# Altium PCB ioT.PcbDoc (part 3 of 3)
Units mm, origin at the board's own origin, x right, y up, seen from the top; angles counter-clockwise.
Board outline 92 x 94 mm, 4 copper layers (Top Layer, GROUND, POWER, Bottom Layer), stack 1.369 mm thick; 127 components, 88 nets, 449 pads, 105 vias.
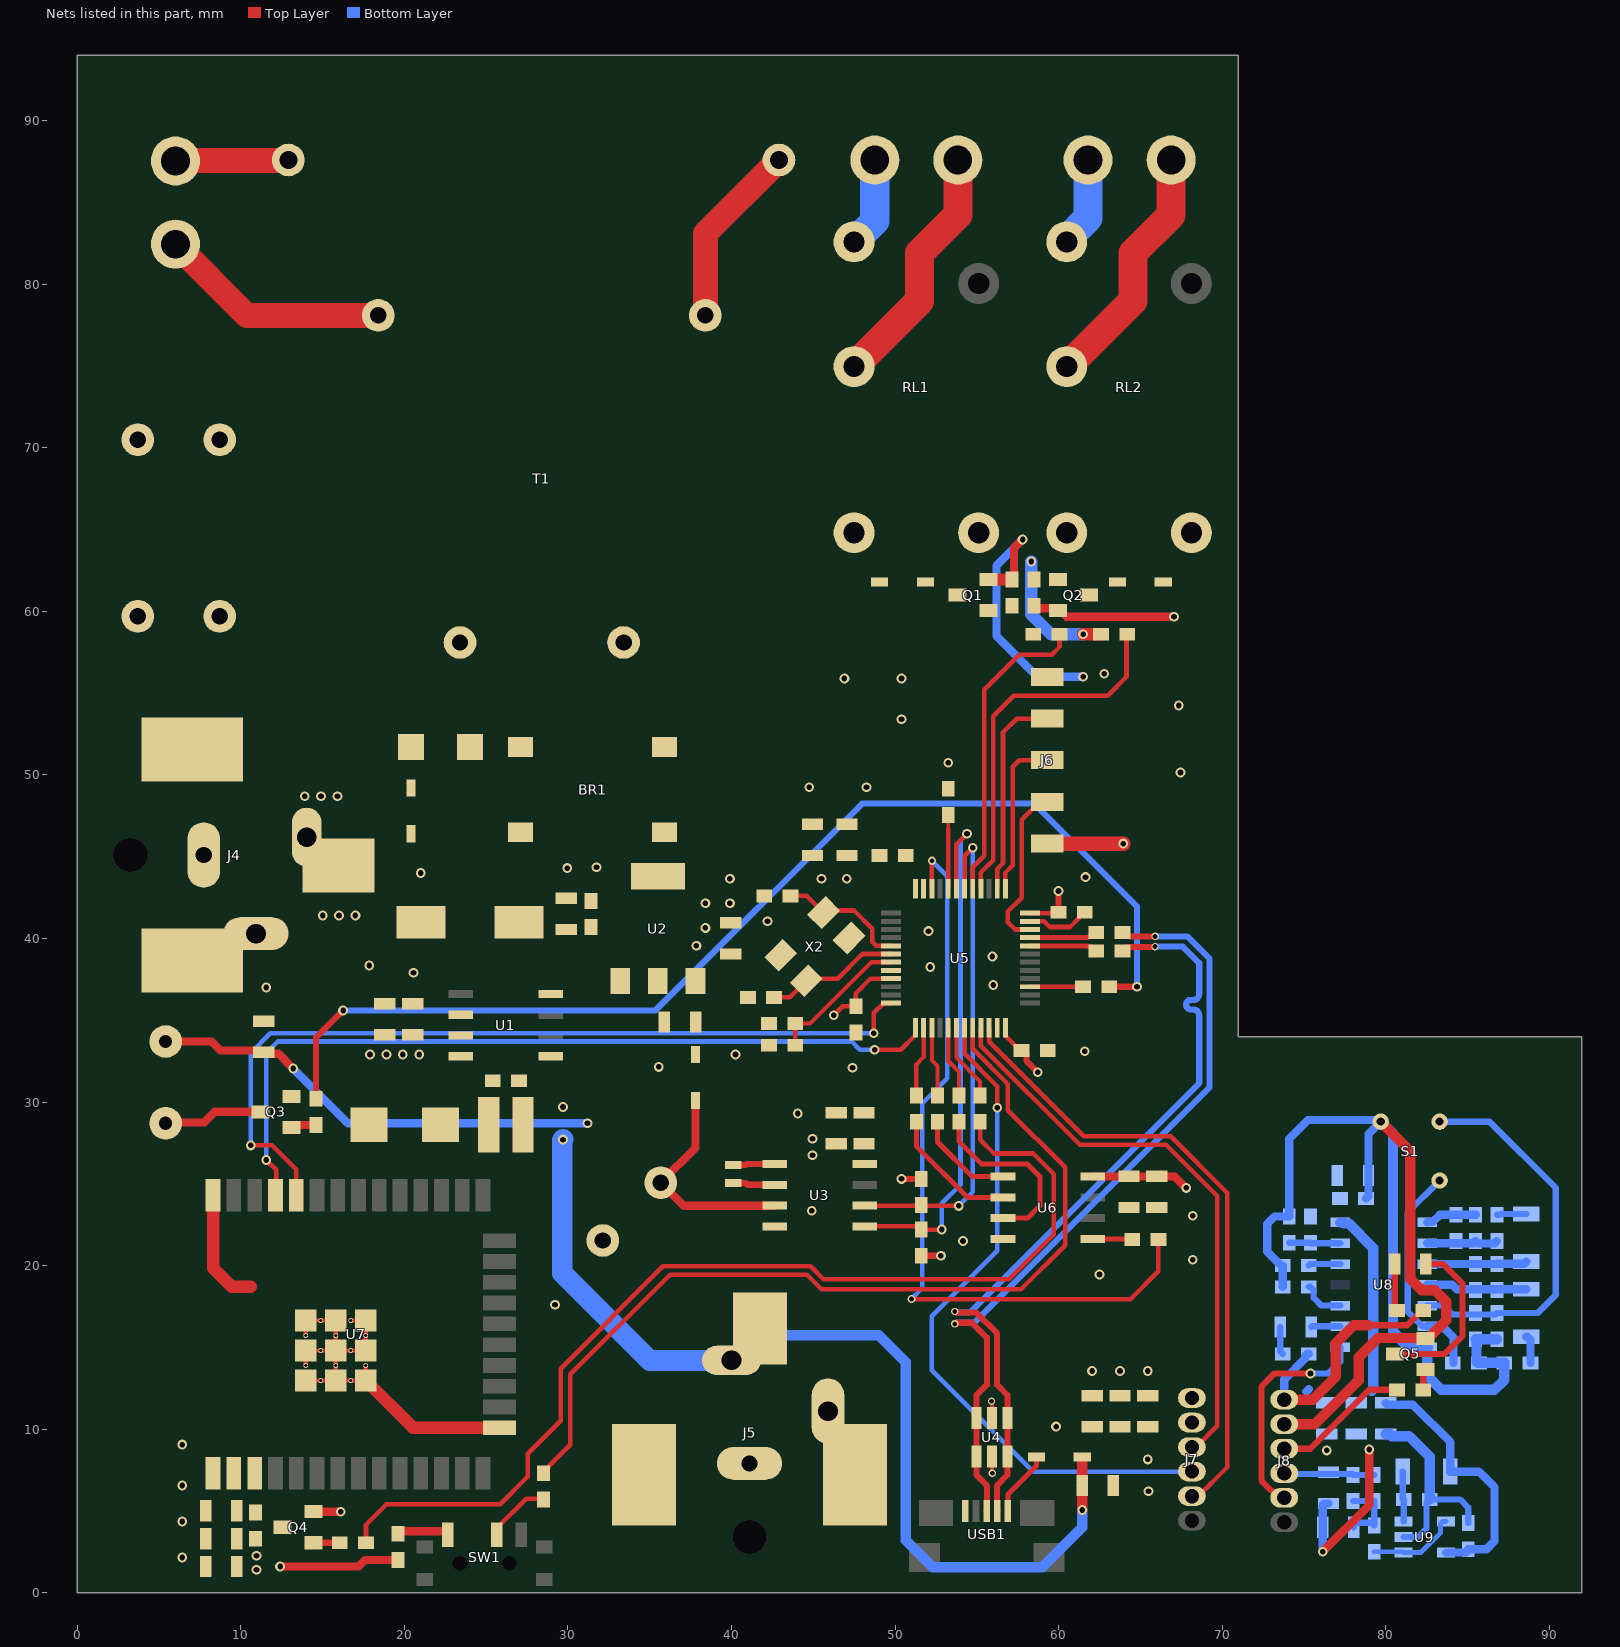
[diagram p4: the nets of this part, all layers, seen from the top]

## Part data (continued)
X2: library part "CRYSTAL 16MHz", "CRYSTAL 16.0000MHZ 20PF SMD", Case/Package=SMD/SMT, ESR (Equivalent Series Resistance)=50R, Frequency=16MHz, Frequency Stability=50ppm, Frequency Tolerance=30ppm, Load Capacitance=20pF, Manufacturer="ECS International", Max Operating Temperature=70°C, Min Operating Temperature=-20°C, Package Quantity=1, Supplier Part Number 1=XC1120CT-ND, Category=Crystals, ComponentLink1Description=https://datasheet.ciiva.com/853/ecx-53b-853408.pdf?src-supplier=Digi-Key, ComponentLink1URL=https://datasheet.ciiva.com/853/ecx-53b-853408.pdf?src-supplier=Digi-Key, ComponentLink2Description=https://datasheet.ciiva.com/853/ecx-53b-853406.pdf?src-supplier=Digi-Key, ComponentLink2URL=https://datasheet.ciiva.com/853/ecx-53b-853406.pdf?src-supplier=Digi-Key, ComponentLink3Description=https://datasheet.ciiva.com/853/ecx-53b-853407.pdf?src-supplier=Digi-Key, ComponentLink3URL=https://datasheet.ciiva.com/853/ecx-53b-853407.pdf?src-supplier=Digi-Key, Designed by=BERK, Height=0.033inch, Lead Free="Lead Free", Length=0.197inch, Manufacturer Part Number=ECS-160-20-30B-TR, Mount="Surface Mount", Packaging="Tape and Reel", Pricing 1="1=1,33000, 10=1,26800, 50=1,23900, 100=1,06200, 500=1,03250 (USD)", RoHS=Yes, RoHS Compliant=Yes, series=ECX-53B, Stock 1=15303, Supplier 1=Digi-Key, Termination=SMD/SMT, Tolerance=50ppm, Width=0.126inch

## Via types
v1: diameter 0.6, hole 0.35, Top Layer to Bottom Layer, tented both sides, 97 vias
v2: diameter 0.45, hole 0.3, Top Layer to Bottom Layer, 4 vias
v3: diameter 0.45, hole 0.3, Top Layer to Bottom Layer, tented both sides, 2 vias
v4: diameter 0.5, hole 0.3, Top Layer to Bottom Layer, tented both sides, 1 vias
v5: diameter 0.5, hole 0.3, Top Layer to Bottom Layer, 1 vias

## Nets (pads, with @x,y where several pads share a name; then routed paths per layer and width w, separated by ;. In a path a pad name is that pad's centre, name@x,y a point inside that pad or via, vN(x,y) a via of type N, cw(c..) or ccw(c..) an arc to the next point about the centre after c; other vN are vias at no path point)
3V3DC: C8.2 C9.2 C10.2 C13.2 C14.2 C17.2 C18.2 C21.2 C22.2 C23.2 C24.2 C25.2 C26.2 C27.2 C28.2 C29.2 C30.2 C31.2 D5.2 J6.1 J7.1 R17.2 R18.2 R19.2 R21.2 U2.3 U3.8 U4.5 U5.9 U5.24 U5.36 U5.48 U6.8 U7.2 | length 33.1
  Top Layer w0.254: U4.5@55.925,8.325 55.925,7.325 v2(55.95,7.3)
  Top Layer w0.279: v1(46.25,35.3) 46.8,35.85 C28.2@47.6,35.85 47.608,35.858 47.608,36.658 48.5,37.55 U5.9@49.75,37.55 ; U5.24@56.75,34.55 56.76,34.54 56.76,34.033 57.544,33.25 57.632,33.151 C27.2@57.738,33.151 ; U5.36@58.25,41.55 59.95,41.55 C26.2@60,41.6
  Top Layer w0.381: v1(50.4,25.3) R17.2@51.6,25.3 ; R18.2@51.6,20.6 v1(52.8,20.6) ; C27.2@57.738,33.151 57.827,33.151 58.03,32.948 58.03,32.519 v1(58.728,31.821) ; C26.2@60,41.6 v1(60,42.9)
  Top Layer w0.508: v1(12.4,1.6) 17.2,1.6 17.6,2 R21.2@19.6,2 ; U6.8@62.1,25.44 65.086,25.44 65.096,25.45 C21.2@66,25.45 67.1,25.45 v1(67.8,24.75)
  Top Layer w0.889: J6.1@59.3,45.82 59.357,45.763 59.395,45.8 v1(63.95,45.8)
  other v1: 10.95,1.4 10.95,2.25 62.05,13.55 63.75,13.55 65.45,13.55 44.95,26.75 44.95,27.75 37.85,39.55 38.4,40.65 38.4,42.15 39.9,42.15 39.9,43.65
3V3DC_S: C34.2 C35.2 C40.2 C41.2 C42.2 C45.2 J8.1 R24.2 R26.2 R32.2 RT1.2 U8.14 U9.5 | length 42.8
  Top Layer w0.381: 78.95,16.35 81.311,16.35 82.211,17.25 R32.2@82.3,17.25
  Top Layer w0.635: J8.1@73.8,11.8 75.536,11.8 76.95,13.214 76.95,15.25 78.05,16.35 78.95,16.35
  Bottom Layer w0.508: 73.8,12.5 73.8,13.039 75.072,14.31 75.072,14.46 75.211,14.6 R26.2@75.3,14.6 ; 75.15,12.3 75.3,12.45 ; C42.2@80,11.6 80.096,11.504 80.677,11.504 80.694,11.487 81.663,11.487 83.95,9.2 RT1.2@83.95,7.4 85.7,7.4 86.65,6.45 86.65,3.15 86.15,2.65 C45.2@85.05,2.65 85.05,2.59 84.91,2.45 U9.5@83.7,2.45
  Bottom Layer w0.635: U8.14@77.221,22.634 77.401,22.634 77.428,22.607 77.428,22.572 77.735,22.572 79.25,21.057 79.25,12.45 79.15,12.35
5VDC: BZ1.2 C3.2 C6.1 C11.2 C12.2 C32.2 D3.1 J5.1 L1.2 U1.4 U2.1 | length 88.1
  Top Layer w0.508: BZ1.2@5.4,33.7 8.2,33.7 8.754,33.146 11.304,33.146 11.496,32.954 12.296,32.954 v1(13.2,32.05)
  Top Layer w0.635: v1(61.45,5.05) 61.45,6.5 61.425,6.525 C3.2@61.45,6.55 D3.1@61.45,8.05
  Bottom Layer w0.508: v1(13.2,32.05) 16.55,28.7 v1(31.2,28.7)
  Bottom Layer w0.635: J5.1@40,14.2 40.9,14.2 42.45,15.75 49,15.75 50.65,14.1 50.65,3.2 52.3,1.55 59,1.55 61.45,4 v1(61.45,5.05)
  Bottom Layer w1.27: v1(29.7,27.7) 29.65,27.65 29.65,19.55 35,14.2 J5.1@40,14.2
  other v1: 29.7,29.7
12VDC: C4.2 C5.2 D1.1 D2.1 D8.1 J4.1 RL1.5 RL2.4 U1.7
  other v1: 17.9,32.9 18.9,32.9 19.9,32.9 20.9,32.9 15,41.4 16,41.4 17,41.4 13.9,48.7 14.9,48.7 15.9,48.7
AC_LINE_1: J1.1 R1.1 | length 6.9
  Top Layer w1.524: J1.1@6,87.54 6.03,87.57 12.87,87.57 R1.1@12.9,87.6
AC_LINE_2: J1.2 T1.5 | length 14.2
  Top Layer w1.524: J1.2@6,82.46 10.36,78.1 T1.5@18.4,78.1
BUZZER: R11.2 R16.1 | length 69.1
  Top Layer w0.381: R16.1@14.6,30.2 14.6,33.95 v1(16.25,35.6) ; R11.2@63.1,37.05 v1(64.8,37.05)
  Bottom Layer w0.381: v1(16.25,35.6) 35.35,35.6 48,48.25 58.5,48.25 64.8,41.95 v1(64.8,37.05)
GND: BR1.4 C1.2 C2.2 C3.1 C4.1 C5.1 C6.2 C8.1 C9.1 C10.1 C11.1 C12.1 C13.1 C14.1 C15.2 C16.2 C17.1 C18.1 C19.2 C20.2 C21.1 C22.1 C23.1 C24.1 C25.1 C26.1 C27.1 C28.1 C29.1 C30.1 C31.1 C32.1 D4.A J4.2 J4.3 J5.2 J5.3 J6.5 J7.2 Q1.2 Q2.2 Q3.2 Q4.2 R4.1 R5.1 R9.1 R10.1 U1.6 U2.2 U3.4 U4.2 U5.8 U5.23 U5.35 U5.47 U6.4 U7.1 U7.15 U7.38 U7.39 USB1.5 X2.2 X2.4 | length 67.3
  Top Layer w0.254: U7.39@13.965,12.965 U7.39@14.883,12.965 U7.39@15.8,12.965 ; U7.39@13.965,13.882 U7.39@13.965,14.8 U7.39@14.883,14.8 U7.39@15.8,14.8 ; U7.39@13.965,15.717 U7.39@13.965,16.635 U7.39@14.883,16.635 U7.39@15.8,16.635 U7.39@15.8,15.717 U7.39@15.8,14.8 ; U7.39@16.718,16.635 U7.39@17.635,16.635 U7.39@17.635,15.717 U7.39@17.635,14.8 U7.39@16.718,14.8 U7.39@15.8,14.8 ; U7.39@17.635,13.882 U7.39@17.635,12.965 U7.39@16.718,12.965 U7.39@15.8,12.965 ; U4.2@55.925,10.675 v2@55.925,11.675 ; U7.39@15.8,12.965 U7.39@15.8,13.882 U7.39@15.8,14.8
  Top Layer w0.279: U5.35@58.25,41.05 59.104,41.05 59.454,40.7 60.7,40.7 61.257,41.257 61.257,41.346 61.511,41.6 C26.1@61.6,41.6
  Top Layer w0.508: Q4.2@14.445,4.95 v1(16.1,4.95) ; R4.1@57.155,61.95 57.27,62.065 57.27,63.87 v1(57.8,64.4) ; R5.1@58.5,60.35 58.5,60.336 58.64,60.196 59.809,60.196 Q2.2@59.955,60.05 ; Q2.2@60.105,60.05 60.48,59.675 v1(67.05,59.675)
  Top Layer w0.762: U7.38@8.3,24.3 8.3,19.85 9.45,18.7 10.6,18.7 ; U7.39@17.635,12.965 20.515,10.085 U7.15@25.81,10.085 ; Q1.2@55.7,61.95 56.507,61.95 R4.1@57.155,61.95
  Bottom Layer w0.508: v1(57.8,64.4) 56.2,62.8 56.2,58.5 58.7,56 v1(61.5,56)
  other v1: 6.409,2.15 6.409,4.35 65.5,6.2 6.409,6.55 65.45,8.15 6.409,9.05 59.85,10.15 29.2,17.6 62.5,19.45 68.2,20.35 54.15,21.5 68.2,23.05 44.9,23.35 44.05,29.3 47.4,32.1 35.55,32.15 40.25,32.9 61.6,33.1 11.55,37 56,37.15 20.55,37.9 52.15,38.25 17.85,38.35 55.95,38.9 52.05,40.45 42.2,41.05 45.5,43.65 47.05,43.65 61.65,43.75 21,44 29.95,44.3 31.75,44.35 44.75,49.25 48.25,49.25 67.45,50.15 53.25,50.75 50.4,53.4 67.35,54.25 46.9,55.9 50.4,55.9 62.79,56.19
  other v2: 55.9,11.7
GND_S: C34.1 C35.1 C37.1 C40.1 C41.1 C42.1 C43.1 C44.1 C45.1 C46.1 C47.1 J8.2 Q5.2 R28.1 R29.1 R30.1 R31.1 R37.1 S1.3 U8.7 U9.2 | length 101.2
  Top Layer w0.508: v1(76.15,2.5) 79,5.35 v1(79,8.75)
  Top Layer w0.635: J8.2@73.8,10.3 75.659,10.3 78.35,12.991 78.35,14.4 79.52,15.57 82.425,15.57 Q5.2@82.445,15.55 82.595,15.55 83.7,16.655 83.7,17.8 83,18.5 82.2,18.5 81.5,19.2 81.5,27 S1.3@79.7,28.8
  Bottom Layer w0.381: U9.2@81.1,3.4 81.95,3.4 82.5,3.95 82.5,5.5 R37.1@82.7,5.7 84.55,5.7 85.05,5.2 C45.1@85.05,4.25
  Bottom Layer w0.508: R30.1@73.7,18.7 73.7,19.352 R29.1@73.7,20 73.611,20 72.75,20.861 72.75,22.55 73.2,23 C37.1@74.1,23 74.1,27.75 75.25,28.9 79.252,28.9 79.258,28.894 79.606,28.894 S1.3@79.7,28.8 78.95,28.05 C35.1@78.95,25.5 78.95,24.24 78.81,24.1 C34.1@78.8,24.1 ; v1(76.15,2.5) C46.1@76.15,4 76.15,5.354 76.246,5.45 C47.1@76.5,5.45
  Bottom Layer w0.635: S1.3@79.7,28.8 80.45,28.05 80.45,15.944 81.38,15.014 82.568,15.014 82.541,14.987 82.541,13.259 83.4,12.4 86.65,12.4 87.25,13 R28.1@87.25,14.05 C43.1@85.7,14.05 85.626,14.05 85.55,14.126 85.55,15.45 R31.1@85.5,15.5 C44.1@86.8,15.5 ; C42.1@80,9.7 80.264,9.7 80.379,9.585 80.379,9.572 81.428,9.572 82.7,8.3 R37.1@82.7,5.7
  other v1: 76.4,8.7
LED_DRIVER: J7.3 U5.21 | length 35.5
  Top Layer w0.279: U5.21@55.25,34.55 55.25,33.45 61.3,27.4 66.55,27.4 69.7,24.25 69.7,10.2 68.4,8.9 J7.3@68.15,8.9
LED_S: J8.3 R33.1 | length 8.4
  Top Layer w0.381: J8.3@73.8,8.8 75.383,8.8 78.983,12.4 R33.1@80.7,12.4
LIGHT_1_GND: J2.2 RL1.3 | length 5.5
  Bottom Layer w1.778: RL1.3@47.49,82.59 48.76,83.86 J2.2@48.76,87.6
LIGHT_1_VCC: J2.1 RL1.2 | length 15.3
  Top Layer w1.778: RL1.2@47.49,74.97 51.5,78.98 51.5,81.9 53.84,84.24 J2.1@53.84,87.6
LIGHT_2_GND: J3.2 RL2.3 | length 5.5
  Bottom Layer w1.778: RL2.3@60.53,82.79 61.8,84.06 J3.2@61.8,87.8
LIGHT_2_VCC: J3.1 RL2.2 | length 15.3
  Top Layer w1.778: RL2.2@60.53,74.97 64.54,78.98 64.54,81.9 66.88,84.24 J3.1@66.88,87.6
MCU_N: R6.1 U5.32 | length 4.2
  Top Layer w0.305: U5.32@58.25,39.55 60.484,39.55 60.49,39.543 61.791,39.543 61.852,39.482 62.059,39.482 R6.1@62.3,39.241
MCU_P: R7.1 U5.33 | length 4.2
  Top Layer w0.305: U5.33@58.25,40.05 59.4,40.05 ; 59.4,40.063 60.696,40.063 60.703,40.057 61.791,40.057 61.852,40.117 62.059,40.117 R7.1@62.3,40.359
NetBR1_1: BR1.1 T1.9
NetBR1_2: BR1.2 T1.7
NetBR1_3: BR1.3 F1.1
NetBZ1_1: BZ1.1 Q3.3 | length 6.1
  Top Layer w0.508: BZ1.1@5.4,28.7 5.45,28.75 7.75,28.75 8.4,29.4 Q3.3@11.2,29.4
NetC1_1: C1.1 C2.1 D8.2 F1.2
NetC7_1: C7.1 U1.1
NetC7_2: C7.2 D4.C L1.1 U1.8
NetC15_1: C15.1 U5.5 X2.3 | length 8
  Top Layer w0.279: C15.1@43.6,42.6 44.6,42.6 45.614,41.586 X2.3@45.63,41.586 45.754,41.71 47.49,41.71 48.6,40.6 48.6,39.799 48.849,39.55 U5.5@49.75,39.55
NetC16_1: C16.1 D5.1 U3.3 | length 13.5
  Top Layer w0.508: D5.1@37.8,30.1 37.8,27.2 C16.1@35.668,25.068 37.071,23.665 U3.3@42.65,23.665
NetC19_1: C19.1 U5.6 X2.1 | length 8.2
  Top Layer w0.279: C19.1@42.6,36.4 43.55,36.4 43.75,36.6 43.756,36.6 X2.1@44.57,37.414 44.693,37.538 46.488,37.538 48,39.05 U5.6@49.75,39.05
NetC33_1: C33.1 R23.1 R25.2 U8.2 | length 4.5
  Bottom Layer w0.508: U8.2@82.541,21.364 84.3,21.364 85.364,21.364 R23.1@85.5,21.5 85.5,21.49 85.64,21.35 86.66,21.35 86.8,21.49 R25.2@86.8,21.5
NetC33_2: C33.2 R23.2 U8.1 | length 3.2
  Bottom Layer w0.508: U8.1@82.541,22.634 82.577,22.67 82.877,22.67 83.307,23.1 R23.2@85.5,23.1
NetC36_1: C36.1 C38.1 R27.2 U8.3 | length 6.1
  Bottom Layer w0.508: U8.3@82.541,20.094 86.794,20.094 R27.2@86.8,20.1 ; R27.2@86.8,20.11 88.46,20.11 C36.1@88.6,20.25
NetC36_2: C36.2 R25.1 | length 1.8
  Bottom Layer w0.381: R25.1@86.8,23.1 86.953,23.1 87.003,23.15 87.546,23.15 C36.2@88.6,23.15
NetC37_2: C37.2 R24.1 U8.13 | length 3.1
  Bottom Layer w0.381: C37.2@74.1,21.4 R24.1@75.4,21.4 ; R24.1@75.4,21.364 U8.13@77.221,21.364
NetC38_2: C38.2 C39.2 R27.1 U8.4 | length 6.2
  Bottom Layer w0.508: U8.4@82.541,18.824 84.076,18.824 84.35,18.55 86.8,18.55 C39.2@88.6,18.55
NetC39_1: C39.1 R28.2 | length 1.7
  Bottom Layer w0.508: C39.1@88.6,15.65 88.654,15.65 88.85,15.454 R28.2@88.85,14.05
NetC43_2: C43.2 S1.1 U8.6 | length 13.8
  Bottom Layer w0.381: U8.6@82.541,16.284 82.241,16.284 81.35,17.175 81.35,23.25 S1.1@83.3,25.2
  Bottom Layer w0.508: U8.6@82.541,16.284 83.466,16.284 84.15,15.6 C43.2@84.15,14.05
NetC44_2: C44.2 R31.2 S1.2 U8.5 | length 23.9
  Bottom Layer w0.381: U8.5@82.541,17.554 83.546,17.554 84.1,17 85.5,17 86.7,17 C44.2@86.8,17.1 ; S1.2@83.3,28.8 86.35,28.8 90.4,24.75 90.4,18.2 89.3,17.1 C44.2@86.8,17.1
NetC46_2: C46.2 R34.1 R35.2 R36.1 | length 4.3
  Bottom Layer w0.381: R36.1@78,5.6 R34.1@79.3,5.6 79.3,4.267 R35.2@79.3,4.1 79.133,4.267 78.21,4.267 78.05,4.108 C46.2@78.05,4
NetD1_2: D1.2 Q1.3 RL1.4
NetD2_2: D2.2 Q2.3 RL2.5
NetD3_2: D3.2 USB1.1 | length 4
  Top Layer w0.305: USB1.1@56.9,5 56.9,6 58.65,7.75 D3.2@58.65,8.3
NetD6_1: D6.1 U8.9 | length 1.8
  Bottom Layer w0.381: D6.1@75.45,16.25 75.484,16.284 U8.9@77.221,16.284
NetD6_2: D6.2 R26.1 | length 1.7
  Bottom Layer w0.381: D6.2@73.55,16.25 73.55,15.398 73.55,14.75 R26.1@73.7,14.6
NetD7_1: D7.1 Q5.3 | length 10.5
  Top Layer w0.381: Q5.3@80.555,14.6 83.6,14.6 84.7,15.7 84.7,18.9 83.5,20.1 D7.1@82.45,20.1
NetD7_2: D7.2 R32.1 | length 2.9
  Top Layer w0.381: D7.2@80.55,20.1 80.55,17.4 R32.1@80.7,17.25
NetJ7_5: J7.5 U5.22 | length 38.9
  Top Layer w0.279: U5.22@55.75,34.55 55.75,33.697 61.547,27.9 66.85,27.9 70.3,24.45 70.3,7.65 68.55,5.9 J7.5@68.15,5.9
NetJ8_5: J8.5 U8.8 | length 13.9
  Top Layer w0.381: J8.5@73.8,5.8 73.45,5.8 72.4,6.85 72.4,12.6 73.2,13.4 v1(75.4,13.4)
  Bottom Layer w0.381: v1(75.4,13.4) 76.5,13.4 77.221,14.121 U8.8@77.221,15.014
NetQ1_1: Q1.1 R2.2 R4.2
NetQ2_1: Q2.1 R3.2 R5.2 | length 8
  Top Layer w0.762: v1(61.5,58.6) R3.2@62.6,58.6
  Bottom Layer w0.762: v1(58.325,63.046) 58.325,59.825 59.55,58.6 v1(61.5,58.6)
NetQ3_1: Q3.1 R16.2 | length 1.6
  Top Layer w0.508: Q3.1@13.09,28.45 13.236,28.596 13.821,28.596 13.825,28.6 R16.2@14.6,28.6
NetQ4_1: Q4.1 R20.2 | length 1.6
  Top Layer w0.381: Q4.1@14.445,3.05 R20.2@16.05,3.05
NetQ5_1: Q5.1 R33.2 | length 1.3
  Top Layer w0.381: R33.2@82.3,12.4 82.3,13.505 Q5.1@82.445,13.65
NetR1_2: R1.2 T1.1 | length 11.4
  Top Layer w1.524: T1.1@38.4,78.1 38.4,83.1 R1.2@42.9,87.6
NetR2_1: R2.1 U5.41 | length 18.9
  Top Layer w0.279: U5.41@54.75,43.05 54.75,44.35 55.45,45.05 55.45,55.2 57.6,57.35 59.58,57.35 60.055,57.825 R2.1@60.055,58.6
NetR3_1: R3.1 U5.40 | length 22.6
  Top Layer w0.279: U5.40@55.25,43.05 55.25,44.031 56,44.781 56,53.6 57.25,54.85 63,54.85 64.15,56 64.15,58.55 R3.1@64.2,58.6
NetR8_1: R8.1 U5.18 | length 4.8
  Top Layer w0.254: U5.18@53.75,34.55 53.75,32.714 55.2,31.264 R8.1@55.2,30.4
NetR10_2: R10.2 U5.44 | length 4.5
  Top Layer w0.203: 53.25,46.686 R10.2@53.25,47.55
  Top Layer w0.254: U5.44@53.25,43.05 53.25,46.686
NetR11_1: R11.1 U5.27 | length 3.2
  Top Layer w0.254: U5.27@58.25,37.05 R11.1@61.5,37.05
NetR12_1: R12.1 U6.1 | length 6.1
  Top Layer w0.305: R12.1@52.6,28.8 52.6,27.55 54.71,25.44 U6.1@56.6,25.44
NetR13_1: R13.1 U6.3 | length 11.4
  Top Layer w0.305: R13.1@53.9,28.8 53.9,27.6 55.3,26.2 58.1,26.2 58.85,25.45 58.85,23.65 58.1,22.9 U6.3@56.6,22.9
NetR14_1: R14.1 U6.2 | length 8.1
  Top Layer w0.305: R14.1@51.3,28.8 51.3,27.3 54.43,24.17 U6.2@56.6,24.17
NetR15_1: R15.1 U6.5 | length 2.4
  Top Layer w0.305: U6.5@62.1,21.63 64.47,21.63 R15.1@64.5,21.6
NetR21_1: R21.1 SW1.1 | length 3.3
  Top Layer w0.508: R21.1@19.6,3.6 19.6,3.619 19.74,3.759 22.554,3.759 22.65,3.663 SW1.1@22.65,3.55
NetR22_1: R22.1 SW1.2 | length 4
  Top Layer w0.279: SW1.2@25.65,3.55 25.65,3.95 27.451,5.751 28.449,5.751 R22.1@28.5,5.7
NetR29_2: R29.2 U8.12 | length 2
  Bottom Layer w0.381: R29.2@75.3,20 75.394,20.094 U8.12@77.221,20.094
NetR30_2: R30.2 U8.10 | length 2.7
  Bottom Layer w0.381: R30.2@75.3,18.7 75.389,18.7 75.592,18.497 75.592,18.038 76.077,17.554 U8.10@77.221,17.554
NetR35_1: R35.1 U9.1 U9.4 | length 5.5
  Bottom Layer w0.305: R35.1@79.3,2.5 81.05,2.5 U9.1@81.1,2.45 82.15,2.45 83.34,3.64 83.34,4.202 83.488,4.35 U9.4@83.7,4.35
NetR37_2: R37.2 RT1.1 U9.3 | length 3.1
  Bottom Layer w0.381: RT1.1@81.05,7.4 81.05,5.75 R37.2@81.1,5.7 U9.3@81.1,4.35
NetU3_1: U3.1 X1.2 | length 2.6
  Top Layer w0.381: X1.2@40.1,26.15 40.854,26.15 40.909,26.205 U3.1@42.65,26.205
NetU3_2: U3.2 X1.1 | length 2.6
  Top Layer w0.381: X1.1@40.1,25.05 40.854,25.05 40.969,24.935 U3.2@42.65,24.935
NRST: C20.1 R9.2 U5.7 | length 8.7
  Top Layer w0.254: C20.1@43.9,33.468 43.9,34.116 R9.2@43.9,34.8 44.8,34.8 48.55,38.55 U5.7@49.75,38.55
RTC_SCL: R17.1 U3.6 U5.42 | length 30.7
  Top Layer w0.279: U3.6@48.15,23.665 51.565,23.665 R17.1@51.6,23.7 51.65,23.65 v1(53.9,23.65) ; U5.42@54.25,43.05 54.25,45.05 v1(54.75,45.55)
  Bottom Layer w0.279: v1(53.9,23.65) 54.75,24.5 v1(54.75,45.55)
RTC_SDA: R18.1 U3.5 U5.43 | length 33.3
  Top Layer w0.279: U3.5@48.15,22.395 50.63,22.395 51.405,22.395 R18.1@51.6,22.2 v1(52.85,22.2) v1@52.9,22.2 ; U5.43@53.75,43.05 53.75,45.75 v1(54.4,46.4)
  Bottom Layer w0.279: v1(52.85,22.2) 52.85,23.8 54,24.95 54,46 v1(54.4,46.4)
SENSOR_ONOFF: R22.2 U5.20 | length 56.6
  Top Layer w0.279: R22.2@28.5,7.3 28.5,7.389 29.073,7.962 30.15,9.039 30.15,13.35 36.25,19.45 44.6,19.45 45.5,18.55 57.7,18.55 60.4,21.25 60.4,26 56.9,29.5 56.9,31.1 54.75,33.25 U5.20@54.75,34.55
SWCLK: J6.3 U5.37 | length 9.9
  Top Layer w0.279: U5.37@56.75,43.05 56.75,44.031 57.2,44.481 57.2,50.5 57.6,50.9 J6.3@59.3,50.9
SWDIO: J6.2 U5.34 | length 10.2
  Top Layer w0.279: U5.34@58.25,40.55 57.35,40.55 56.9,41 56.9,41.65 57.75,42.5 57.75,47.26 58.85,48.36 J6.2@59.3,48.36
TDI: J6.4 U5.38 | length 12.7
  Top Layer w0.279: U5.38@56.25,43.05 56.25,44.25 56.6,44.6 56.6,52.6 57.44,53.44 J6.4@59.3,53.44
TEMP_ADC: C47.2 J8.4 R34.2 R36.2 | length 5.5
  Bottom Layer w0.381: J8.4@73.8,7.3 73.85,7.25 76.5,7.25 77.95,7.25 R36.2@78,7.2 R34.2@79.3,7.2
TEMP_IN_CS: R14.2 U5.14 | length 4.3
  Top Layer w0.254: R14.2@51.3,30.4 51.3,32.3 51.75,32.75 U5.14@51.75,34.55
TEMP_IN_OT: R15.2 U5.46 | length 47.6
  Top Layer w0.279: v5(51,17.95) 64.4,17.95 66.1,19.65 R15.2@66.1,21.6 ; U5.46@52.25,43.05 v4(52.25,44.75)
  Bottom Layer w0.279: v5(51,17.95) 51.65,18.6 51.65,29.9 53.2,31.45 53.2,43.8 v4(52.25,44.75)
TEMP_IN_SCLK: R12.2 U5.15 | length 4.3
  Top Layer w0.254: U5.15@52.25,34.55 52.25,32.55 52.6,32.2 R12.2@52.6,30.4
TEMP_IN_SIO: R13.2 U5.17 | length 4.4
  Top Layer w0.254: U5.17@53.25,34.55 53.25,32.5 53.9,31.85 R13.2@53.9,30.4
TEMPERATURE_ADC: J7.4 U5.19 | length 42.1
  Top Layer w0.279: U5.19@54.25,34.55 54.25,32.95 56.25,30.95 v1(56.25,29.65)
  Bottom Layer w0.279: v1(56.25,29.65) 56.25,20.9 52.25,16.9 52.25,13.6 58.45,7.4 J7.4@68.342,7.4
USB_N: R6.2 U4.1 U4.6 USB1.2 | length 48.9
  Top Layer w0.374: v2(53.65,17.191) 53.713,17.128 54.96,17.128 56.239,15.849 56.239,12.711 56.875,12.075 U4.1@56.875,10.675 U4.6@56.875,8.325 56.875,7.197 56.239,6.561 56.239,5.011 USB1.2@56.25,5 ; R6.2@63.9,39.241 64.107,39.448 64.377,39.448 64.415,39.486 v3@65.9,39.486
  Bottom Layer w0.374: v2(53.65,17.191) 53.684,17.191 53.747,17.128 54.568,17.128 68.6,31.16 68.6,35.1 68.6,35.287 ccw(c68.226,35.287) 68.226,35.661 68.086,35.661 cw(c68.086,35.95) 68.086,36.238 68.226,36.238 ccw(c68.226,36.612) 68.6,36.612 68.6,37.6 68.6,38.1 68.6,38.496 67.596,39.5 v3(65.895,39.5)
USB_P: R7.2 U4.3 U4.4 USB1.3 | length 48.9
  Top Layer w0.374: v2(53.65,16.437) 53.737,16.437 53.8,16.5 54.7,16.5 55.611,15.589 55.611,12.711 54.975,12.075 U4.3@54.975,10.675 U4.4@54.975,8.325 54.975,7.197 55.611,6.561 55.611,5.011 USB1.3@55.6,5 ; R7.2@63.9,40.359 64.107,40.152 64.377,40.152 64.415,40.114 v3@65.9,40.114
  Bottom Layer w0.374: v2(53.65,16.437) 53.684,16.437 53.747,16.5 54.828,16.5 69.228,30.9 69.228,38.756 67.856,40.128 v3(65.9,40.128)
WIFI_EN: R8.2 R20.1 | length 64
  Top Layer w0.279: R20.1@17.65,3.05 17.65,4.15 18.9,5.4 25.85,5.4 27.55,7.1 27.55,8.5 29.55,10.5 29.55,13.7 35.8,19.95 44.85,19.95 45.65,19.15 56.95,19.15 59.7,21.9 59.7,25.6 58.45,26.85 56.05,26.85 55.2,27.7 R8.2@55.2,28.8
WIFI_OUT: Q4.3 R19.1 U7.3
WIFI_RXD: U5.12 U7.34 | length 51.8
  Top Layer w0.279: v1(10.6,27.35) 11.9,27.35 13.38,25.87 U7.34@13.38,24.3 ; v1(48.7,34.2) 48.7,35.45 49.3,36.05 U5.12@49.75,36.05
  Bottom Layer w0.279: v1(10.6,27.35) 10.6,33 11.8,34.2 v1(48.7,34.2)
WIFI_TXD: U5.13 U7.35 | length 50
  Top Layer w0.279: v1(11.55,26.45) 12.15,25.85 12.15,24.34 U7.35@12.11,24.3 ; v1(48.75,33.2) 50.35,33.2 51.25,34.1 U5.13@51.25,34.55
  Bottom Layer w0.279: v1(11.55,26.45) 11.55,33 12.25,33.7 47.35,33.7 47.85,33.2 v1(48.75,33.2)
pads on no net: J4. J5. J7.6 J8.6 RL1.1 RL2.1 SW1. SW1.3 U1.2 U1.3 U1.5 U3.7 U5.1 U5.2 U5.3 U5.4 U5.10 U5.11 U5.16 U5.25 U5.26 U5.28 U5.29 U5.30 U5.31 U5.39 U5.45 U6.6 U6.7 U7.4 U7.5 U7.6 U7.7 U7.8 U7.9 U7.10 U7.11 U7.12 U7.13 U7.14 U7.16 U7.17 U7.18 U7.19 U7.20 U7.21 U7.22 U7.23 U7.24 U7.25 U7.26 U7.27 U7.28 U7.29 U7.30 U7.31 U7.32 U7.33 U7.36 U7.37 U8.11 USB1. USB1.4

## Polygon pours and split planes (outlines as drawn)
NetBR1_2 on Top Layer "NONET_L-01_P-001" (solid, pour order 1): 22.3,60.3 21.3,59.3 21.3,57.1 22.4,56 27.5,56 33.2,50.3 37.1,50.3 37.4,50.6 37.4,52.7 37.1,53 34.4,53 27.1,60.3
NetBR1_1 on Top Layer "NONET_L-01_P-001" (solid, pour order 6): 33.1,60.3 31.7,58.9 31.7,57.3 34.6,54.4 37.3,54.4 38.5,53.2 38.5,49.7 37.3,48.5 34.6,48.5 33.8,47.7 33.8,46.4 34.3,45.9 39.2,45.9 40.8,47.5 40.8,56 36.5,60.3
GND on Top Layer "NONET_L-01_P-001" (solid, remove dead copper, pour order 18): 1.95,72.9 0.85,71.8 0.85,29.65 4.5,26 26.3,26 27.5,24.8 27.5,10.35 30.5,7.35 30.5,2.55 32.25,0.8 69.4,0.8 70.6,2 70.6,55.4 69.05,56.95 45.3,56.95 37,48.65 16.3,48.65 9,55.95 7.45,55.95 5.7,57.7 5.7,71.5 4.3,72.9
GND_S on Top Layer "NONET_L-01_P-001" (solid, remove dead copper, pour order 25): 90.9,33.45 91.6,32.75 91.6,9.5 82.6,9.5 82.6,0.5 73.45,0.5 72.2,1.75 72.2,32.3 73.35,33.45
GND on Top Layer "Top Layer-GND" (solid, pour order 17): 8.65,6.2 8.75,6.3 8.75,8.75 11,11 19.3,11 19.55,11.25 19.55,18.4 18.7,19.25 8.35,19.25 6,16.9 6,1.15 6.25,0.9 8.4,0.9 8.65,1.15
3V3DC on Top Layer "Top Layer-3V3DC" (solid, pour order 14): 37.4,32.35 38.15,32.35 38.75,32.95 38.75,39.6 39.35,40.2 40.65,40.2 41.1,40.65 41.1,43.95 43.25,46.1 49.55,46.1 49.95,45.7 49.95,44.075 51.1,43.5 51.1,42.45 51.4,42.45 51.4,46 49.65,47.75 42.35,47.75 37.7,43.1 37.7,42.4 37,41.7 37,32.75
5VDC on Top Layer "Top Layer-5VDC" (solid, pour order 11): 26.4,27 26.7,26.7 32.3,26.7 33.7,28.1 33.7,34.5 28.7,39.5 28.7,39.8 28.9,40 30.4,40 31.9,38.5 31.9,37 32.6,36.3 33.8,36.3 34,36.5 34,39.7 32.4,41.3 29.5,41.3 28.7,42.1 28,42.8 25.4,42.8 24.5,41.9 24.5,38.2 26.8,35.9 30,35.9 30.7,35.2 30.7,31.1 30.05,30.45 26.55,30.45 26.4,30.3
NetC1_1 on Top Layer "NONET_L-01_P-001" (solid, pour order 7): 21.4,48.9 20.7,48.2 18.8,48.2 17.6,49.4 9.7,57.3 8.1,57.3 6.7,58.7 6.7,71.6 8,72.9 10,72.9 11.7,71.2 11.7,63.2 11.7,59.4 17.6,53.5 20.7,53.5 21.4,52.8
GND on Bottom Layer "Bottom Layer-GND" (solid, pour order 22): 5.75,1.05 6.25,0.55 68.15,0.55 70.1,2.5 70.1,56.1 69,57.2 43.6,57.2 39.95,53.55 9,53.55 5.8,56.75 5.8,71.6 4.65,72.75 1.95,72.75 1.05,71.85 1.05,50.2 1.05,37.75 3,35.8 7.65,35.8 10.55,35.8 11.8,34.55 11.8,28.65 14.1,26.35 25,26.35 27.65,23.7 27.65,6.55 26.55,5.45 6.6,5.45 5.75,4.6
GND_S on Bottom Layer "NONET_L-01_P-001" (solid, remove dead copper, pour order 24): 90.9,33.45 91.6,32.75 91.6,1.25 90.85,0.5 73.45,0.5 72.2,1.75 72.2,32.3 73.35,33.45
3V3DC on POWER (split plane): 11.75,54.15 44.351,54.15 40.783,50.582 18.817,50.582 17.699,51.699 17.641,51.744 17.573,51.772 17.5,51.782 13.2,51.782 13.127,51.772 13.059,51.744 13.001,51.699 11.601,50.299 11.556,50.241 11.528,50.173 11.518,50.1 11.518,42.7 11.528,42.627 11.556,42.559 11.601,42.501 13.818,40.283 13.818,33.1 13.828,33.027 13.856,32.959 13.901,32.901 15.601,31.201 15.659,31.156 15.727,31.128 15.8,31.118 20.9,31.118 20.973,31.128 21.021,31.148 21.041,31.156 21.099,31.201 22.399,32.501 22.444,32.559 22.472,32.627 22.482,32.7 22.482,37.6 22.472,37.673 22.444,37.741 22.399,37.799 19.055,41.144 19.055,41.827 19.055,44.056 20.917,45.918 41.1,45.918 41.173,45.928 41.221,45.948 41.241,45.956 41.299,46.001 52.517,57.218 64.6,57.218 64.673,57.228 64.741,57.256 64.799,57.301 69.749,62.25 69.963,62.036 69.963,1.1 69.971,1 69.994,0.903 70.013,0.858 70.013,0.6 70.02,0.51 0.51,0.51 0.51,6.15 7.7,6.15 7.7,25.45 0.51,25.45 0.51,76.55 11.75,76.55
12VDC on POWER (split plane): 69.263,66.638 69.263,63 69.271,62.9 69.294,62.803 69.318,62.745 69.318,62.617 64.483,57.782 52.4,57.782 52.327,57.772 52.259,57.744 52.201,57.699 40.983,46.482 20.8,46.482 20.727,46.472 20.659,46.444 20.601,46.399 18.574,44.372 18.529,44.314 18.501,44.246 18.491,44.173 18.491,41.827 18.491,41.027 18.501,40.954 18.529,40.886 18.574,40.828 21.918,37.483 21.918,32.817 20.783,31.682 15.917,31.682 14.382,33.217 14.382,40.4 14.372,40.473 14.356,40.513 14.344,40.541 14.299,40.599 12.082,42.817 12.082,49.983 13.317,51.218 17.383,51.218 18.501,50.101 18.559,50.056 18.627,50.028 18.7,50.018 40.9,50.018 40.973,50.028 41.021,50.048 41.041,50.056 41.099,50.101 44.949,53.951 44.994,54.009 45.022,54.077 45.032,54.15 45.032,66.833 45.399,67.2 49.301,67.2 50.901,65.601 55.001,61.501 55.059,61.456 55.079,61.448 55.127,61.428 55.2,61.418 63.9,61.418 63.973,61.428 64.041,61.456 64.099,61.501 65.499,62.901 65.544,62.959 65.572,63.027 65.582,63.1 65.582,65.883 66.899,67.2 68.701,67.2
3V3DC_S on POWER (split plane): 91.49,0.51 72.237,0.51 72.237,33.49 91.49,33.49
5VDC on POWER (split plane): 31.075,31.925 31.15,31.917 32.091,31.917 32.967,31.041 32.967,27.059 27.079,21.171 27.032,21.113 26.996,21.047 26.975,20.975 26.967,20.9 26.967,16.2 26.975,16.125 26.996,16.053 27.032,15.987 27.079,15.929 28.129,14.879 28.187,14.832 28.253,14.796 28.325,14.775 28.4,14.767 34.85,14.767 34.925,14.775 34.997,14.796 35.063,14.832 35.121,14.879 38.159,17.917 41.941,17.917 43.017,16.841 43.017,13.009 41.041,11.033 26.409,11.033 24.583,12.859 24.583,27.891 28.634,31.942 31.017,31.942
12VDC on POWER (split plane): 65.101,66.199 65.056,66.141 65.028,66.073 65.018,66 65.018,63.217 63.783,61.982 55.317,61.982 51.299,65.999 50.099,67.2 66.101,67.2
GND on GROUND (split plane): 11.75,54.15 44.9,54.15 44.9,67.2 69.913,67.2 69.913,0.51 0.51,0.51 0.51,6.05 7.35,6.05 7.35,25.45 0.51,25.45 0.51,76.55 11.75,76.55
GND_S on GROUND (split plane): 91.49,0.51 72.037,0.51 72.037,33.49 91.49,33.49

## Keep-outs
Top Layer:
  circle w0.254: c66.85,32.7 r1.5
Keep-Out Layer:
  the board outline again, w0.254

## Other copper
Top Layer:
  region: 66.85,33.2 ccw(c66.85,32.7) 66.35,32.7 ccw(c66.85,32.7) 66.85,32.2 ccw(c66.85,32.7) 67.35,32.7 ccw(c66.85,32.7)
  region net NetJ8_5: 74.45,5.15 74.75,5.45 74.75,6.15 74.45,6.45 73.05,6.45 72.85,6.25 72.85,5.45 73.15,5.15
  region net 3V3DC_S: 73.15,12.45 72.85,12.15 72.85,11.45 73.15,11.15 74.45,11.15 75.1,11.8 74.45,12.45
  region net LED_S: 73.15,9.45 72.85,9.15 72.85,8.45 73.15,8.15 74.45,8.15 75.1,8.8 74.45,9.45
  region net GND_S: 73.15,10.95 72.85,10.65 72.85,9.95 73.15,9.65 74.45,9.65 75.1,10.3 74.45,10.95
  pour cut-out: 34,36.5 34,34.619 33.881,34.5 32.85,34.5 31.65,35.7 32.1,36.15 32.1,36.85 33.15,36.85 33.25,36.75
  pour cut-out: 66.1,41.2 66.7,40.6 66.7,38.8 66.1,38.2 61.25,38.2 60.75,38.7 59,38.7 59,41.15 58.95,41.2
  region net WIFI_OUT: 10.4,8.35 10.3,8.25 10.3,6.25 10.45,6.1 10.45,4.45 10.55,4.35 11.5,4.35 11.95,3.9 11.95,3.55 12.1,3.4 13.1,3.4 13.3,3.6 13.3,4.5 12.85,4.95 12.05,4.95 11.35,5.65 11.35,8.25 11.25,8.35
  region net 3V3DC: 9.05,1.15 9.35,0.85 12.85,0.85 13.4,1.4 13.4,1.8 12.9,2.3 11.975,2.3 11.75,2.525 11.75,3.7 11.3,4.15 10.4,4.15 10.15,4.4 10.15,6 10.05,6.1 10.05,8.3 10,8.35 9.1,8.35 9.05,8.3
  region net 12VDC: 66.45,66.5 65.5,65.55 65.5,61.1 65.8,60.8 67.6,60.8 69.7,62.9 69.7,65.55 68.75,66.5
  region net NetD2_2: 61.15,60.6 61.4,60.35 63.7,60.35 64.35,61 64.35,65.25 62.9,66.7 59.6,66.7 59.05,66.15 59.05,64 59.95,63.1 60.7,63.1 61.15,62.65
  region net NetQ2_1: 57.95,61.55 57.95,63.3 58.1,63.45 58.9,63.45 59.65,62.7 60.4,62.7 60.7,62.4 60.7,61.5 60.45,61.25 58.25,61.25
  region net NetQ1_1: 55.3,60.95 55,60.65 55,58.4 55.4,58 58.9,58 59.1,58.2 59.1,59.05 58.9,59.25 58,59.25 57.8,59.45 57.8,60.65 57.5,60.95
  region net NetD1_2: 51.2,61.45 52.4,60.25 54.3,60.25 54.5,60.45 54.5,62.55 54.95,63 55.9,63 56.65,63.75 56.65,65.95 56.1,66.5 52.25,66.5 51.2,65.45
  region net 12VDC: 49.6,65.5 48.55,66.55 46.35,66.55 45.85,66.05 45.85,62.55 47,61.4 49.45,61.4 49.6,61.55
  region net 3V3DC: 61.05,11.3 61.05,13.55 61.6,14.1 65.85,14.1 66.4,13.55 66.4,12.9 66.8,12.5 68.9,12.5 69.1,12.3 69.1,11.55 68.85,11.3
  region net 3V3DC: 48.65,28.2 49.15,27.7 49.15,25.95 48.9,25.7 45.25,25.7 44.35,26.6 44.35,27.85 44.7,28.2
  region net NetC7_1: 27,33.2 26.4,32.6 26.4,30.9 26.55,30.75 29.85,30.75 30,30.9 30,33 29.8,33.2
  region net NetC7_2: 22.7,33.2 22.5,33 22.5,31.1 22,30.6 21.1,30.6 20.7,30.2 20.7,27.1 21.1,26.7 25.7,26.7 26,27 26,32.6 25.4,33.2
  region net 12VDC: 24.2,34.5 21.6,34.5 21.3,34.8 17.8,34.8 17.5,34.5 17.5,32.7 17.8,32.4 21,32.4 21.3,32.7 21.3,33.6 21.4,33.7 24.2,33.7 24.4,33.9 24.4,34.3
  region net 12VDC: 18.3,47.3 16.3,49.3 13.3,49.3 12.2,48.2 12.2,43.4 14.7,40.9 17.9,40.9 18.5,41.5 18.5,44.303 19.697,45.5 20.755,45.5 21.099,45.843 21.099,46.901 20.7,47.3
  region net NetBR1_3: 28.1,53.3 23.3,53.3 22.9,52.9 22.9,50.4 23.3,50 28.1,50 28.4,50.3 28.4,53
Bottom Layer:
  region net 3V3DC: 68.814,11.29 69.207,11.684 69.207,12.093 68.17,13.13 67.093,12.053 67.093,11.684 67.486,11.29
  region: 67.486,5.01 67.093,4.616 67.093,4.207 68.13,3.17 69.207,4.247 69.207,4.616 68.814,5.01
  region net GND: 18.71,19.22 19.5,18.43 19.5,11.62 20.64,10.48 27.2,10.48 27.88,11.16 27.93,11.11 27.93,9.13 27.33,9.73 20.27,9.73 18.97,11.03 10.22,11.03 7.1,7.91 7.1,5.78 7.69,5.19 7.55,5.05 5.69,5.05 5.32,5.42 5.32,8.73 6.1,9.51 7.94,9.51 12.96,14.53 12.96,18.33 13.85,19.22
  region net 3V3DC_S: 73.1,12.8 74.95,14.65 75.35,14.25 74.55,13.45 74.55,13.05 74.9,12.7 75.2,12.7
  region net 3V3DC_S: 78.425,12.65 79.125,13.35 79.375,13.35 80.075,12.65
  region net 3V3DC_S: 74.95,22.45 75.15,22.25 77.85,22.25 78,22.4 78,26.85 77.6,27.25 75.25,27.25 74.95,26.95
  region net TEMP_ADC: 73.15,7.95 72.85,7.65 72.85,6.95 73.15,6.65 74.45,6.65 75.1,7.3 74.45,7.95
  region net GND_S: 73.1,10.95 72.85,10.7 72.85,10 73.2,9.65 74.85,9.65 75.25,9.25 75.25,8.7 75.75,8.2 79.65,8.2 81.325,9.875 80.6,10.6 74.85,10.6 74.5,10.95
  region net 3V3DC_S: 81.95,11.15 82.15,11.35 80.7,12.8 73.1,12.8 72.8,12.5 72.8,11.5 73.15,11.15
  region net 5VDC: 42.4,16.05 39,16.05 37.75,14.8 37.75,13.6 38.6,12.75 41.15,12.75 44.05,15.65 44.05,15.683
  region net 5VDC: 28.5,27.1 28.5,26.8 29.625,25.675 30.65,26.7 30.65,27.15
  region net 5VDC: 25.95,28.5 26.1,28.5 26.4,28.2 26.4,27 26.7,26.7 32.3,26.7 32.5,26.9 32.5,30.25 32.25,30.5 26.6,30.5 26.4,30.3 26.4,29.15 26.15,28.9 25.95,28.9
GROUND (plane layer: these items are gaps in the copper):
  rectangle: 67.17,8.87 69.11,11.52
  rectangle: 72.77,8.64 74.88,11.62
  rectangle: 16.46,13.58 16.96,14.12
  rectangle: 14.65,13.64 15.11,14.12
  rectangle: 15.57,14.57 16.03,15.05
  rectangle: 16.49,15.45 16.94,15.97
  rectangle: 14.65,15.45 15.12,15.97
  rectangle: 0.05,6.05 7.35,25.45
  rectangle: 0.1,76.55 70.9,93.7
  rectangle: 44.25,67.2 70.9,77.55
  rectangle: 11.75,54.15 44.9,94
  lines w1.27: 70.55,0.15 70.55,93.8 ; 70.9,0.15 71.4,0.15 71.4,33.55 ; 71,0.4 71,34
POWER (plane layer: these items are gaps in the copper):
  rectangle: 0.15,6.15 7.7,25.45
  rectangle: 0.1,76.55 70.9,93.7
  rectangle: 11.75,54.15 44.9,94
  rectangle: 44.25,67.2 70.9,77.55
  lines w0.559: 11.8,42.7 14.1,40.4 14.1,33.1 15.8,31.4 20.9,31.4 22.2,32.7 22.2,37.6 18.773,41.027 18.773,41.827 18.773,44.173 20.8,46.2 41.1,46.2 52.4,57.5 64.6,57.5 69.6,62.5 69.6,66.7 68.7,67.6 66.9,67.6 65.3,66 65.3,63.1 63.9,61.7 55.2,61.7 51.1,65.8 49,67.9 45.7,67.9 44.75,66.95 44.75,54.15 40.9,50.3 18.7,50.3 17.5,51.5 13.2,51.5 11.8,50.1 11.8,42.7
  lines w0.762: 31.15,32.3 32.25,32.3 33.35,31.2 33.35,26.9 27.35,20.9 27.35,16.2 28.4,15.15 34.85,15.15 38,18.3 42.1,18.3 43.4,17 43.4,12.85 41.2,10.65 26.25,10.65 24.2,12.7 24.2,28.05 28.475,32.325 32.225,32.325
  lines w1.27: 69.9,68.8 69.9,63 70.65,62.25 ; 70.6,68.75 70.6,1.1 71,0.7 71,0.25 ; 70.65,33.75 70.65,0.6 71,0.25 ; 71,34 71,0.25 ; 71.6,0.1 71.6,33.9

## Silkscreen, mask and mechanical layers (free items; w line width, h text height)
Top Overlay:
  drawing of 1311 lines, arcs and shapes, not listed
  text "AC" at 4.804,91.654 h1.52
  text "12V" at 12.854,50.754 h1.52
  text "PROG." at 66.354,42.704 h1
  text "WiFi_sec._det._v01" at 70.233,23.95 h1 r90
  text "WiFi_sec._det._v01" at 91.183,16.1 h1 r90
  text "SENSOR" at 69.996,15.154 h1 r90
  text "5V" at 35.446,14.204 h1.52 r90
Bottom Overlay:
  circle w0.2: c74.6,31.3 r1.118
  lines w0.1: 78,8.45 77.7,8.2 ; 77.7,8.2 77.45,8.45 77.7,8.2 ; 77.7,8.2 77.7,8.8 87.45,8.8 87.45,8.7 ; 87.45,8.7 91.25,8.7 91.25,3.45 87.45,3.45 87.45,8.7 ; 75.65,1.75 80.05,1.75 80.05,8 76.95,8 75.65,8 75.65,1.75 ; 83.6,14.706 87.429,14.706 87.429,24.1 85.45,24.1 83.6,24.1 83.6,14.706
  lines w0.15: 85.75,24.9 85.45,24.4 ; 86.8,28.95 85.45,28.95 85.45,24.4 ; 85.45,24.4 85.15,24.9 85.45,24.4 ; 86.8,25.15 90.4,25.15 90.4,32.75 86.8,32.75 86.8,25.15
  text "TP_GND" at 76.45,32.483 h0.8
  text "MAIN" at 74.85,1.7 h0.7
Top Solder:
  region: 66.85,34.7 cw(c66.85,32.7) 68.85,32.7 cw(c66.85,32.7) 66.85,30.7 cw(c66.85,32.7) 64.85,32.7 cw(c66.85,32.7) 66.85,34.7
Bottom Solder:
  region: 74.6,32.3 73.6,31.3 74.6,30.3 75.6,31.3
  region: 69.04,11.8 69.04,12.25 68.23,13.06 68.12,13.06 67.26,12.2 67.26,11.78
  region: 67.26,4.5 67.26,4.05 68.07,3.24 68.18,3.24 69.04,4.1 69.04,4.52
Route Tool Path:
  lines w0.3: 71.15,7.2 71.15,7.3 ; 71.15,7.8 71.15,7.9 ; 71.15,8.4 71.15,8.5 ; 71.15,9 71.15,9.1 ; 71.15,28.2 71.15,28.3 ; 71.15,28.8 71.15,28.9 ; 71.15,29.4 71.15,29.5 ; 71.15,30 71.15,30.1 ; 71.85,7.2 71.85,7.3 ; 71.85,7.8 71.85,7.9 ; 71.85,8.4 71.85,8.5 ; 71.85,9 71.85,9.1 ; 71.85,28.2 71.85,28.3 ; 71.85,28.8 71.85,28.9 ; 71.85,29.4 71.85,29.5 ; 71.85,30 71.85,30.1
  lines w1: 0.35,7.1 0.35,24.15 ; 1.1,24.3 1.2,24.3 1.2,7.35 ; 2,7.45 2.15,7.45 2.15,23.8 ; 71.5,0 71.5,6.3 ; 71.5,10 71.5,13.4 71.5,16.5 ; 71.5,17.8 71.5,17.85 ; 71.5,19.15 71.5,19.2 ; 71.5,20.5 71.5,23.9 71.5,27.3 ; 71.5,31 71.5,34.4 92.5,34.4 92.5,-0.5 89.55,-0.5 -0.5,-0.5 -0.5,1.75 -0.5,7.05 ; 71.5,34 71.5,94.5 -0.5,94.5 -0.5,24.35 ; -0.5,7.05 -0.5,24.35 ; -0.5,7.05 3.05,7.05 3.05,24.35 -0.5,24.35

## Text inside footprints (layer, text, board x,y; h text height)
BR1: Top Overlay "~" at 35.516,51.054 h1.52 r90; Top Overlay "~" at 35.616,45.954 h1.52 r90
J7: Top Overlay "1" at 70.196,14.104 h1.52 r90
J8: Bottom Overlay "1" at 72.404,13.854 h0.5 r270
S1: Top Overlay "G" at 80.377,29.601 h1; Top Overlay "S" at 84.177,27.501 h1; Top Overlay "D" at 81.554,24.554 h1
T1: Top Overlay "INPUT" at 16.646,83.346 h1 r180; Top Overlay "OUTPUT" at 39.154,52.854 h1